# EAGLE board SwimWatch2.1 (EAGLE 6.6.0)

Size 100 x 80 mm. Coordinates in mm from the lower left corner, seen from the top.
Outline: 0,0 100,0 100,80 0,80 0,0
Copper layers (1*16): Top 0.035mm / dielectric 1.5mm / Bottom 0.035mm
Design rules "default": minimum track width 10mil, minimum drill 24mil, track to track 8mil, track to pad 8mil, pad to pad 8mil, via to via 8mil, smd to smd 8mil, copper to edge 40mil, drill to drill 8mil, minimum pad ring 10mil, minimum via ring 8mil, stop-mask expansion 4mil, vias tented up to drill 0mil, thermal gap 10mil

## Footprints (pad centres in the part's own frame; a part is rotated, then mirrored left to right if it is on the bottom)
1X01NS-KIT = drill 1.016 pad 1.88: 1 0,0
C0805 = smd 1.3 x 1.5: 1 -0.95,0; 2 0.95,0
DS-01 = drill 0.813 long: 1 0,-3.81; 2 0,3.81
SO-08 = smd 0.6 x 2.2: 1 -1.905,-2.6; 2 -0.635,-2.6; 3 0.635,-2.6; 4 1.905,-2.6; 5 1.905,2.6; 6 0.635,2.6; 7 -0.635,2.6; 8 -1.905,2.6
SOT23-5L = smd 0.55 x 1.2: 1 -0.95,-1.3; 2 0,-1.3; 3 0.95,-1.3; 4 0.95,1.3; 5 -0.95,1.3
0204/5 = drill 0.813 octagon: 1 -2.54,0; 2 2.54,0
M0805 = smd 1.3 x 1.6: 1 -0.95,0; 2 0.95,0
MA04-1 = drill 1.016 long: 1 -3.81,0; 2 -1.27,0; 3 1.27,0; 4 3.81,0
TQFP32-08 = smd 1.27 x 0.559: 1 -4.293,2.8; 2 -4.293,2; 3 -4.293,1.2; 4 -4.293,0.4; 5 -4.293,-0.4; 6 -4.293,-1.2; 7 -4.293,-2; 8 -4.293,-2.8; 17 4.293,-2.8; 18 4.293,-2; 19 4.293,-1.2; 20 4.293,-0.4; 21 4.293,0.4; 22 4.293,1.2; 23 4.293,2; 24 4.293,2.8 | smd 0.559 x 1.27: 9 -2.8,-4.293; 10 -2,-4.293; 11 -1.2,-4.293; 12 -0.4,-4.293; 13 0.4,-4.293; 14 1.2,-4.293; 15 2,-4.293; 16 2.8,-4.293; 25 2.8,4.293; 26 2,4.293; 27 1.2,4.293; 28 0.4,4.293; 29 -0.4,4.293; 30 -1.2,4.293; 31 -2,4.293; 32 -2.8,4.293
DS2782 = smd 1 x 0.3: 1 0.5,2.1; 2 0.5,1.45; 3 0.5,0.8; 4 0.5,0.15; 5 5.9,2.1; 6 5.9,1.45; 7 5.9,0.8; 8 5.9,0.15

## Placement (x,y rotation side)
BAT+VE  M01NOSILK-KIT  [1X01NS-KIT]  5.08,49.53 0 top
BAT_GND  M01NOSILK-KIT  [1X01NS-KIT]  38.1,53.34 0 top
C3  1uF  [C0805]  24.13,38.1 0 top
C3(DECUP)  0.1uF  [C0805]  29.21,38.1 0 top
C4  1uF  [C0805]  19.05,38.1 0 top
C5  1uF  [C0805]  13.97,38.1 0 top
C6  1uF  [C0805]  8.89,38.1 0 top
CHARGE+VE  M01NOSILK-KIT  [1X01NS-KIT]  35.56,53.34 0 top
DOWN  [DS-01]  25.4,15.24 0 top
GND  M01NOSILK-KIT  [1X01NS-KIT]  33.02,53.34 0 top
IC1  24LC64SN  [SO-08]  34.29,26.67 0 top
IC2  MCP73831/OT  [SOT23-5L]  17.78,26.67 0 top
ON  [DS-01]  20.32,15.24 0 top
R1  20mOhm  [0204/5]  11.43,44.45 0 top
R2  1K  [M0805]  36.83,44.45 0 top
R3  1K  [M0805]  31.75,44.45 0 top
R4  [0204/5]  3.81,-2.54 0 top
R5  500  [0204/5]  25.4,49.53 0 top
R6  1k  [0204/5]  17.78,49.53 0 top
R7  5k  [0204/5]  6.35,6.35 0 top
SELECT  [DS-01]  33.02,15.24 0 top
SV1  [MA04-1]  22.86,43.18 0 top
U1  ATMEGA328P  [TQFP32-08]  7.62,16.51 0 top
U$1  DS2782  [DS2782]  7.62,49.53 0 top
UP  [DS-01]  15.24,15.24 0 top

## Library data of the parts
BAT+VE BAT_GND CHARGE+VE GND = SparkFun-Connectors
C3 C3(DECUP) C4-C6 R1-R7 = rcl
DOWN ON SELECT UP = switch-dil; OC_FARNELL: unknown; OC_NEWARK: unknown
IC1 = microchip; MF: MICROCHIP; MPN: 24LC64-I/SN; OC_FARNELL: 9758070; OC_NEWARK: 12C2020
IC2 = adafruit
SV1 = con-lstb; OC_FARNELL: unknown; OC_NEWARK: unknown
U1 = SparkFun-DigitalIC; PROD_ID: IC-09069
U$1 = Components

## Nets
+3V3: BAT+VE.1 C3(DECUP).2 C4.2 C5.1 C6.2 IC1.8 IC2.3 R2.2 R3.2 R4.2 R5.2 R6.2 SV1.1 U1.4 U1.6
DOWN: DOWN.1 U1.31
GND: C3(DECUP).1 C5.2 C6.1 DOWN.2 IC1.1 IC1.2 IC1.3 IC1.4 ON.2 R1.1 SELECT.2 SV1.2 U1.3 U1.5 U$1.7 UP.2
N$1: IC2.1 R4.1 U1.1
N$3: U1.30 UP.1
N$4: IC2.5 R7.2
N$5: ON.1 U1.32
N$6: SELECT.1 U1.2
N$8: C3.2 CHARGE+VE.1 IC2.4
N$10: C4.1 IC2.2 R7.1
N$11: BAT_GND.1 R1.2 R5.1 U$1.2 U$1.4
N$12: R6.1 U$1.3
N$13: C3.1 GND.1
SCL: IC1.6 SV1.3 U1.28 U$1.6
SDA: IC1.5 R2.1 R3.1 SV1.4 U1.27 U$1.5

## Tracks (layer width: path | path; a pad name or v marks a point on that pad's centre or on a via)
+3V3  (14 unrouted)
DOWN  (1 unrouted)
GND  (15 unrouted)
N$1  (2 unrouted)
N$3  (1 unrouted)
N$4  (1 unrouted)
N$5  (1 unrouted)
N$6  (1 unrouted)
N$8  (2 unrouted)
N$10  (2 unrouted)
N$11  (4 unrouted)
N$12  (1 unrouted)
N$13  (1 unrouted)
SCL  (3 unrouted)
SDA  (5 unrouted)